# Altium PCB Main.PcbDoc
Units mm, origin at the board's own origin, x right, y up, seen from the top; angles counter-clockwise.
Board outline 149.63 x 99.44 mm, 2 copper layers (Top Layer, Bottom Layer); 13 components, 23 nets, 198 pads, 0 vias.
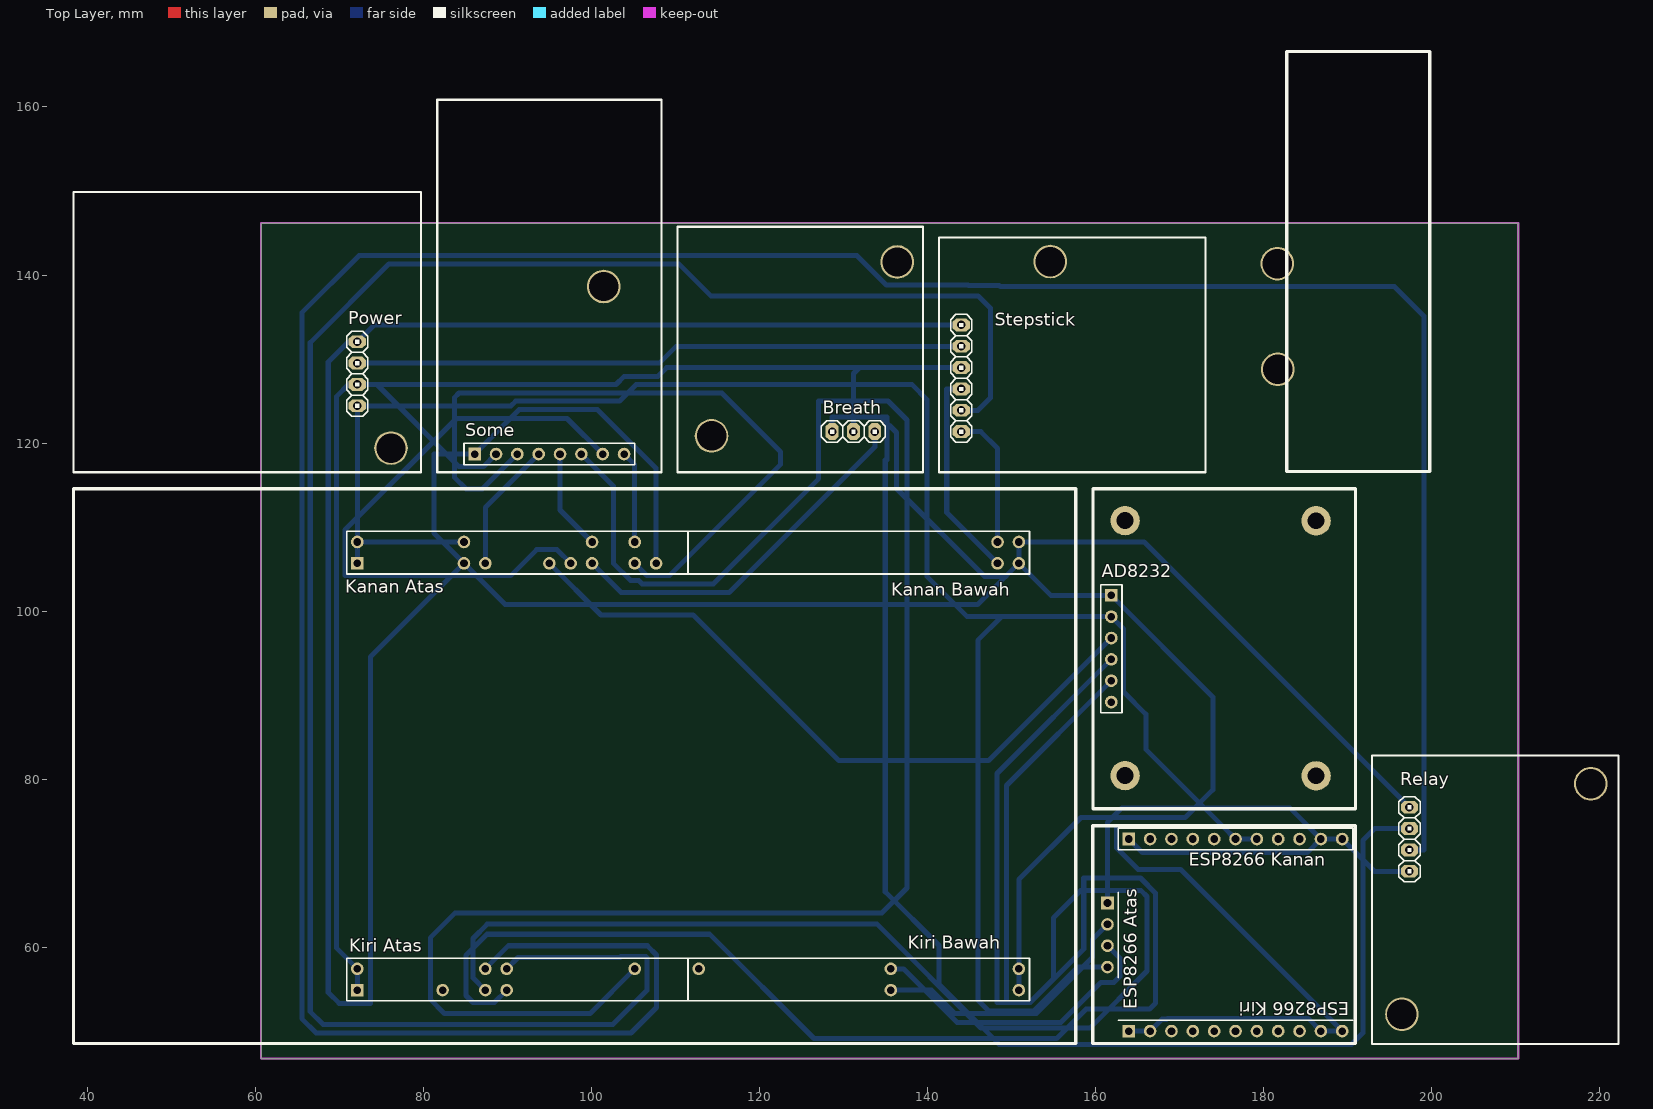
[diagram p0: Top Layer view]
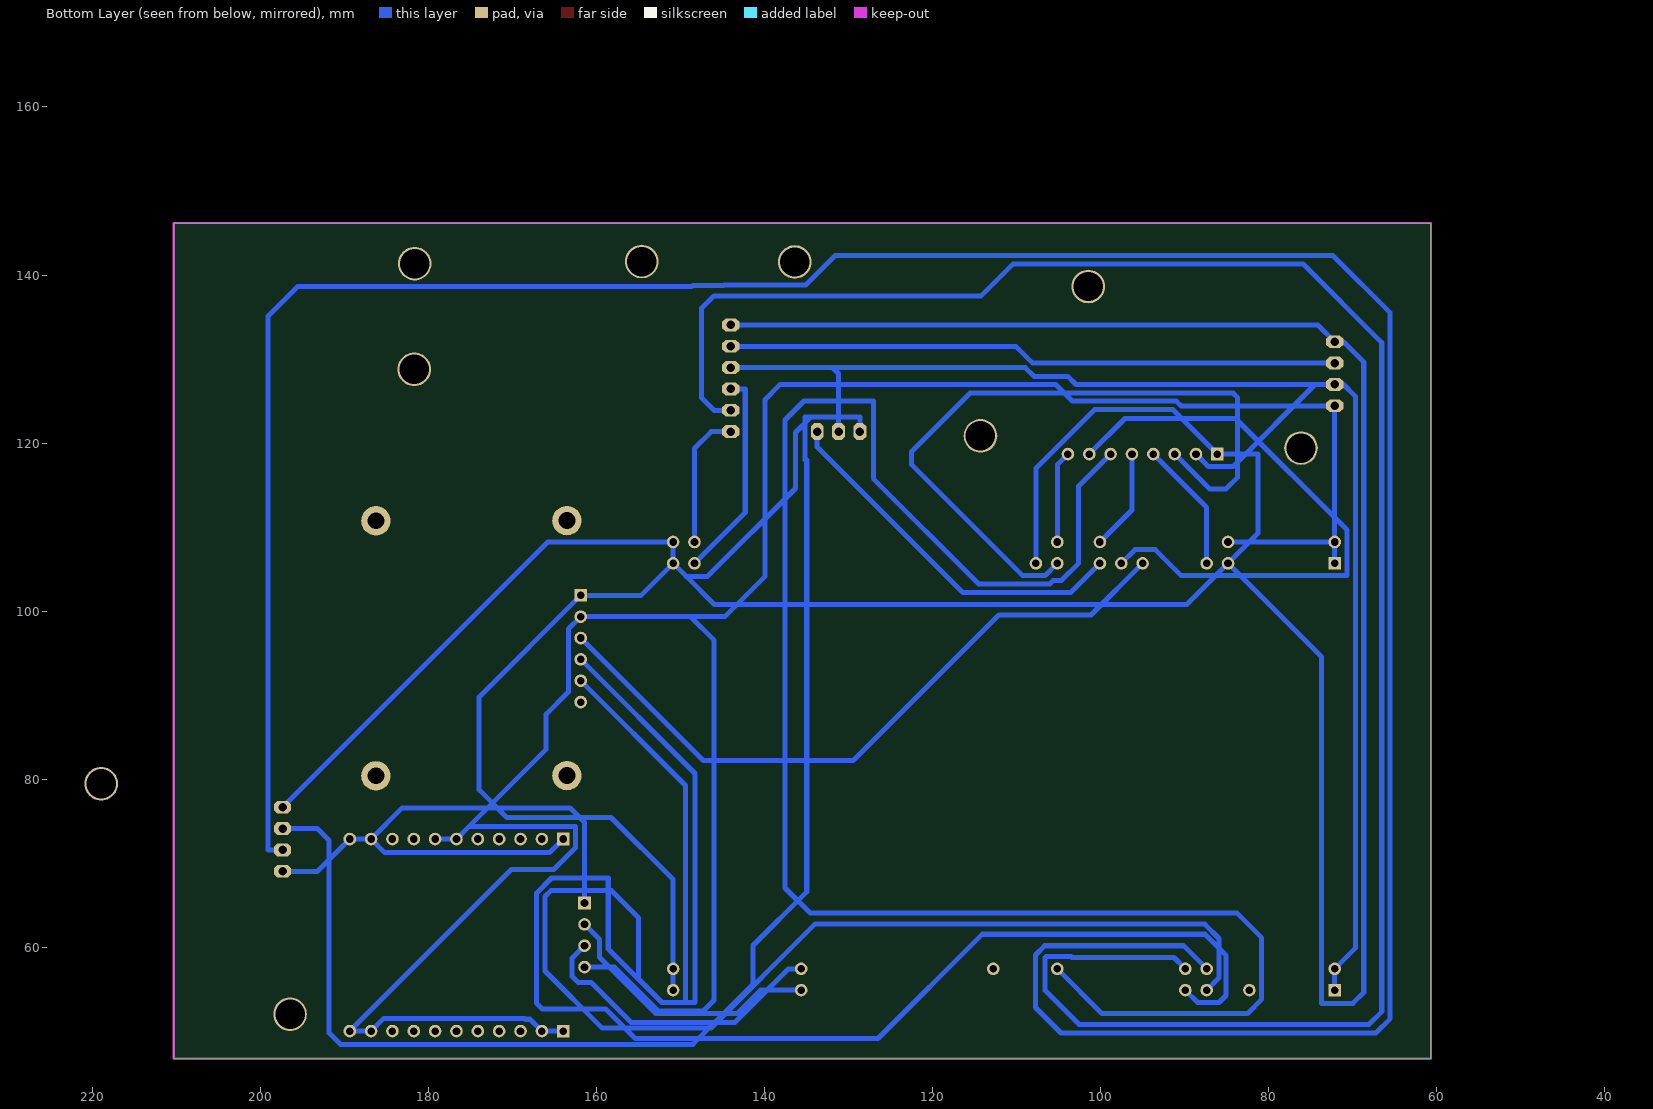
[diagram p1: Bottom Layer view, seen from below]

## Layer stack, top to bottom
Top Solder: solder mask 0.0102, Solder Resist, Dk 3.5
Top Layer: signal copper 0.0356
Dielectric 1: dielectric 0.32, FR-4, Dk 4.8
Bottom Layer: signal copper 0.0356
Bottom Solder: solder mask 0.0102, Solder Resist, Dk 3.5

## Board outline
60.706,46.736 210.337,46.736 210.337,146.177 60.706,146.177

## Design rules (kind name [scope] priority, off if disabled: settings)
Clearance [All] p1: gap=0.4
PolygonConnect [All] p1: connectstyle=Relief reliefconductorwidth=0.254 reliefentries=4 polygonreliefangle="90 Angle" airgapwidth=0.254
RoutingVias [All] p1: holewidth=0.711 width=1.27 viastyle="Through Hole" minholewidth=0.711 minwidth=1.27 maxholewidth=0.711 maxwidth=1.27
SolderMaskExpansion [All] p1: expansion=0.102
Width Width_1 [All] p1: maxlimit=0.6 minlimit=0.6 preferedwidth=0.6
30 further rules are at their usual default settings.

## Components (designator, comment, footprint, x,y, rotation, side; value= is the part's Value field where it differs from the comment)
AD8232 "" HDR1X6 161.9,101.879 r270 top
Breath "Breath" My_1X03 131.216,121.361 r0 top (schematic designator o)
"ESP8266 Atas" "" HDR1X4 161.447,65.258 r270 top
"ESP8266 Kanan" "" HDR1X11 163.987,72.878 r0 top
"ESP8266 Kiri" "" HDR1X11 163.987,50.018 r0 top
"Kanan Atas" "" HDR2X16#1 72.161,105.689 r0 top
"Kanan Bawah" "" HDR2X16#2 112.801,105.689 r0 top
"Kiri Atas" "" HDR2X16#3 72.161,54.889 r0 top
"Kiri Bawah" "" HDR2X16#4 112.801,54.889 r0 top
Power "Header 4" My_1X04 72.161,128.245 r270 top
Relay "Header 4" My_1X04 197.383,72.847 r270 top
Some "Header 8" HDR1X8 86.131,118.694 r0 top
Stepstick "Header 6" My_1X06 144.043,127.711 r270 top

## Footprints (in the part's own frame and the unit in brackets; to place one, negate y for a bottom-side part, rotate by r counter-clockwise, add the part's x,y. Pads: shape width x height; smd on the part's side, far side on the other; paste and mask are expansions set on the pad)
HDR1X4 [mm] "Connector; Header; 4 Position"
  rect 1.5x1.5 hole 0.9: 1(0,0)
  round 1.5 hole 0.9: 2(2.54,0) 3(5.08,0) 4(7.62,0)
  silkscreen extent -1.27,1.27 8.89,1.27
HDR1X6 [mm] "Connector; Header; 6 Position"
  rect 1.5x1.5 hole 0.9: 1(0,0)
  round 1.5 hole 0.9: 2(2.54,0) 3(5.08,0) 4(7.62,0) 5(10.16,0) 6(12.7,0)
  silkscreen extent -1.27,-1.27 13.97,1.27
HDR1X8 [mm] "Connector; Header; 8 Position"
  rect 1.5x1.5 hole 0.9: 1(0,0)
  round 1.5 hole 0.9: 2(2.54,0) 3(5.08,0) 4(7.62,0) 5(10.16,0) 6(12.7,0) 7(15.24,0) 8(17.78,0)
  silkscreen extent -1.27,-1.27 19.05,1.27
HDR1X11 [mm] "Connector; Header; 11 Position"
  rect 1.5x1.5 hole 0.9: 1(0,0)
  round 1.5 hole 0.9: 2(2.54,0) 3(5.08,0) 4(7.62,0) 5(10.16,0) 6(12.7,0) 7(15.24,0) 8(17.78,0) 9(20.32,0) 10(22.86,0) 11(25.4,0)
  silkscreen extent -1.27,-1.27 26.67,1.27
HDR2X16#1 [mm] "Connector; Header; 16x2 Position"
  rect 1.5x1.5 hole 0.9: 1(0,0)
  round 1.5 hole 0.9: 2(0,2.54) 11(12.7,0) 12(12.7,2.54) 13(15.24,0) 19(22.86,0) 21(25.4,0) 23(27.94,0) 24(27.94,2.54) 27(33.02,0) 28(33.02,2.54) 29(35.56,0)
  round 0 all layers, no hole: 3(2.54,0) 4(2.54,2.54) 5(5.08,0) 6(5.08,2.54) 7(7.62,0) 8(7.62,2.54) 9(10.16,0) 10(10.16,2.54) 14(15.24,2.54) 15(17.78,0) 16(17.78,2.54) 17(20.32,0) 18(20.32,2.54) 20(22.86,2.54) 22(25.4,2.54) 25(30.48,0) 26(30.48,2.54) 30(35.56,2.54) 31(38.1,0) 32(38.1,2.54)
  silkscreen extent -1.27,-1.27 39.37,3.81
HDR2X16#2 [mm] "Connector; Header; 16x2 Position"
  rect 0x0 all layers, no hole: 1(0,0)
  round 0 all layers, no hole: 2(0,2.54) 3(2.54,0) 4(2.54,2.54) 5(5.08,0) 6(5.08,2.54) 7(7.62,0) 8(7.62,2.54) 9(10.16,0) 10(10.16,2.54) 11(12.7,0) 12(12.7,2.54) 13(15.24,0) 14(15.24,2.54) 15(17.78,0) 16(17.78,2.54) 17(20.32,0) 18(20.32,2.54) 19(22.86,0) 20(22.86,2.54) 21(25.4,0) 22(25.4,2.54) 23(27.94,0) 24(27.94,2.54) 25(30.48,0) 26(30.48,2.54) 27(33.02,0) 28(33.02,2.54)
  round 1.5 hole 0.9: 29(35.56,0) 30(35.56,2.54) 31(38.1,0) 32(38.1,2.54)
  silkscreen extent -1.27,-1.27 39.37,3.81
HDR2X16#3 [mm] "Connector; Header; 16x2 Position"
  rect 1.5x1.5 hole 0.9: 1(0,0)
  round 1.5 hole 0.9: 2(0,2.54) 9(10.16,0) 13(15.24,0) 14(15.24,2.54) 15(17.78,0) 16(17.78,2.54) 28(33.02,2.54)
  round 0 all layers, no hole: 3(2.54,0) 4(2.54,2.54) 5(5.08,0) 6(5.08,2.54) 7(7.62,0) 8(7.62,2.54) 10(10.16,2.54) 11(12.7,0) 12(12.7,2.54) 17(20.32,0) 18(20.32,2.54) 19(22.86,0) 20(22.86,2.54) 21(25.4,0) 22(25.4,2.54) 23(27.94,0) 24(27.94,2.54) 25(30.48,0) 26(30.48,2.54) 27(33.02,0) 29(35.56,0) 30(35.56,2.54) 31(38.1,0) 32(38.1,2.54)
  silkscreen extent -1.27,-1.27 39.37,3.81
HDR2X16#4 [mm] "Connector; Header; 16x2 Position"
  rect 0x0 all layers, no hole: 1(0,0)
  round 1.5 hole 0.9: 2(0,2.54) 19(22.86,0) 20(22.86,2.54) 31(38.1,0) 32(38.1,2.54)
  round 0 all layers, no hole: 3(2.54,0) 4(2.54,2.54) 5(5.08,0) 6(5.08,2.54) 7(7.62,0) 8(7.62,2.54) 9(10.16,0) 10(10.16,2.54) 11(12.7,0) 12(12.7,2.54) 13(15.24,0) 14(15.24,2.54) 15(17.78,0) 16(17.78,2.54) 17(20.32,0) 18(20.32,2.54) 21(25.4,0) 22(25.4,2.54) 23(27.94,0) 24(27.94,2.54) 25(30.48,0) 26(30.48,2.54) 27(33.02,0) 28(33.02,2.54) 29(35.56,0) 30(35.56,2.54)
  silkscreen extent -1.27,-1.27 39.37,3.81
My_1X03 [mil]
  oct 60x80 hole 40: 1(-100,0) 2(0,0) 3(100,0)
  silkscreen extent -150,-50 150,50
My_1X04 [mil]
  oct 60x80 hole 40: 1(-150,0) 2(-50,0) 3(50,0) 4(150,0)
  silkscreen extent -200,-50 200,50
My_1X06 [mil]
  oct 60x80 hole 40: 1(-250,0) 2(-150,0) 3(-50,0) 4(50,0) 5(150,0) 6(250,0)
  silkscreen extent -300,-50 300,50

## Part data
AD8232: library part "Header 6", "Header, 6-Pin"
Breath: library part "Header 3", "Header, 3-Pin"
"ESP8266 Atas": library part "Header 4", "Header, 4-Pin"
"ESP8266 Kanan" "ESP8266 Kiri": library part "Header 11", "Header, 11-Pin"
"Kanan Atas" "Kanan Bawah" "Kiri Atas" "Kiri Bawah": library part "Header 16X2", "Header, 16-Pin, Dual row"
Power Relay: "Header, 4-Pin"
Some: "Header, 8-Pin"
Stepstick: "Header, 6-Pin"

## Free pads (board coordinates)
  round 4 hole 3.5: 2(154.635,141.605) 2(181.661,141.355) 2(181.712,128.778) 3(101.498,138.633) 8(76.175,119.405) 9(114.325,120.853) 9(136.423,141.554) 10(196.494,52.019) 10(218.973,79.451)
  round 3.5 hole 2: 6(186.274,80.395) 7(163.541,80.42) 8(163.541,110.773) 9(186.274,110.748)

## Nets (pads, with @x,y where several pads share a name; then routed paths per layer and width w, separated by ;. In a path a pad name is that pad's centre, name@x,y a point inside that pad or via, vN(x,y) a via of type N, cw(c..) or ccw(c..) an arc to the next point about the centre after c; other vN are vias at no path point)
+3.3: "ESP8266 Atas.4" "ESP8266 Kanan.6" "ESP8266 Kanan.7" "ESP8266 Kiri.1" "ESP8266 Kiri.2" "ESP8266 Kiri.10" "ESP8266 Kiri.11" "Kanan Atas.1" "Kanan Atas.2" "Kanan Atas.12" AD8232.2 Power.4 | length 323.8
  Bottom Layer w0.6: 72.161,105.689 72.161,108.229 ; 84.861,108.229 72.161,108.229 ; 161.447,57.638 157.897,57.638 152.659,52.4 147.32,52.4 146.016,53.704 146.016,96.52 148.836,99.339 ; 163.987,50.018 166.527,50.018 167.933,51.423 168.496,51.423 168.609,51.537 185.328,51.537 186.847,50.018 189.387,50.018 170.164,69.24 165.1,69.24 162.535,71.806 162.535,74.346 175.219,74.346 ; 179.227,72.878 176.687,72.878 175.219,74.346 ; 72.161,108.229 Power.4 90.449,124.435 91.008,124.993 103.378,124.993 105.334,126.949 138.201,126.949 139.954,125.197 139.954,104.14 144.755,99.339 148.836,99.339 ; 148.836,99.339 AD8232.2 163.373,97.866 163.373,90.373 166.014,87.732 166.014,83.55 175.219,74.346
+5: "Kiri Atas.1" "Kiri Atas.2" Breath.2 Power.3 Relay.2 Some.2 Stepstick.3 | length 331.6
  Bottom Layer w0.6: 72.161,54.889 72.201,54.929 72.201,57.39 72.161,57.429 69.711,59.879 69.711,125.566 71.12,126.975 Power.3 74.498,126.975 ; Some.2 87.198,117.221 84.252,117.221 74.498,126.975 ; Breath.2 131.216,123.088 ; Stepstick.3 131.928,128.981 ; Relay.2 193.269,74.117 191.872,72.72 191.872,49.809 190.5,48.438 148.565,48.438 141.402,55.601 141.402,60.198 135.001,66.599 135.001,118.008 135.23,118.008 135.23,123.088 131.216,123.088 ; 74.498,126.975 102.962,126.975 103.937,127.949 107.959,127.949 108.991,128.981 131.928,128.981 ; 131.216,123.088 131.216,128.27 131.928,128.981
+7.4: Power.2 Stepstick.2 | length 72.7
  Bottom Layer w0.6: Power.2 108.102,129.515 110.109,131.521 Stepstick.2
GND: "Kanan Atas.11" "Kanan Atas.29" "Kanan Bawah.31" "Kanan Bawah.32" "Kiri Bawah.31" "Kiri Bawah.32" AD8232.1 Breath.1 Power.1 Relay.1 Some.1 Stepstick.1 | length 519.8
  Bottom Layer w0.6: 107.721,105.689 107.721,117.018 100.762,123.977 91.415,123.977 Some.1 81.28,118.694 81.28,109.271 84.861,105.689 ; Breath.1 128.676,123.088 134.518,123.088 136.347,121.26 136.347,114.605 146.812,104.14 149.352,104.14 ; Stepstick.1 74.168,134.061 Power.1 71.12,132.055 68.707,129.642 68.707,54.61 70.002,53.315 73.736,53.315 73.736,94.564 84.861,105.689 ; 150.901,54.889 150.901,57.429 150.901,68.047 158.293,75.438 170.688,75.438 173.99,78.74 173.99,89.789 AD8232.1 154.711,101.879 150.901,105.689 ; Relay.1 165.811,108.229 150.901,108.229 150.901,105.689 ; 84.861,105.689 89.764,100.787 145.999,100.787 149.352,104.14 ; 149.352,104.14 150.901,105.689
NetAD8232_3: "Kanan Atas.19" AD8232.3 | length 82.7
  Bottom Layer w0.6: 95.021,105.689 101.168,99.543 112.141,99.543 129.489,82.194 147.295,82.194 AD8232.3
NetAD8232_4: "Kiri Atas.15" AD8232.4 | length 190.8
  Bottom Layer w0.6: 89.941,54.889 88.468,53.416 85.928,53.416 85.09,54.254 85.09,59.03 87.605,61.544 114.097,61.544 126.514,49.127 155.401,49.127 158.902,52.629 166.446,52.629 167.157,53.34 167.157,66.437 165.37,68.224 158.623,68.224 158.623,59.778 152.261,53.416 148.311,53.416 148.311,80.67 AD8232.4
NetAD8232_5: "Kiri Atas.13" AD8232.5 | length 174.7
  Bottom Layer w0.6: 87.401,54.889 85.928,56.363 85.928,61.036 87.63,62.738 134.036,62.738 146.406,50.368 159.334,50.368 166.141,57.175 166.141,66.04 165.456,66.726 158.242,66.726 155.016,63.5 155.016,56.236 152.197,53.416 149.428,53.416 149.428,79.248 AD8232.5
NetBuzzer_1: "Kiri Atas.9"
"NetESP8266 Atas_1": "ESP8266 Atas.1" "ESP8266 Kanan.1" "ESP8266 Kanan.10" "ESP8266 Kanan.11" Relay.4 | length 73.6
  Bottom Layer w0.6: 161.447,65.258 161.447,74.858 163.17,76.581 183.144,76.581 186.847,72.878 ; 163.987,72.878 165.618,71.247 185.216,71.247 186.847,72.878 ; Relay.4 193.227,69.037 189.387,72.878 186.847,72.878
"NetESP8266 Atas_2": "ESP8266 Atas.2" "Kiri Bawah.19" | length 32.6
  Bottom Layer w0.6: 135.661,54.889 140.513,54.889 143.281,52.121 152.984,52.121 159.639,58.776 159.639,60.91 161.447,62.718
"NetESP8266 Atas_3": "ESP8266 Atas.3" "Kiri Bawah.20" | length 36.4
  Bottom Layer w0.6: 135.661,57.429 137.16,57.429 143.561,51.029 155.888,51.029 160.663,55.804 162.204,55.804 162.916,56.515 162.916,58.709 161.447,60.178
"NetKanan Atas_13": "Kanan Atas.13" Some.4 | length 15.6
  Bottom Layer w0.6: 87.401,105.689 87.401,112.344 Some.4
"NetKanan Atas_20": "Kanan Atas.20"
"NetKanan Atas_21": "Kanan Atas.21" Some.7 | length 72.2
  Bottom Layer w0.6: 97.561,105.689 95.936,107.315 93.523,107.315 90.424,104.216 71.704,104.216 71.681,104.239 70.711,104.239 70.711,109.677 83.97,122.936 97.13,122.936 Some.7
"NetKanan Atas_23": "Kanan Atas.23" Breath.3 | length 44.1
  Bottom Layer w0.6: 100.101,105.689 103.575,102.216 116.43,102.216 133.756,119.543 Breath.3
"NetKanan Atas_24": "Kanan Atas.24" Some.5 | length 12
  Bottom Layer w0.6: Some.5 96.291,112.039 100.101,108.229
"NetKanan Atas_27": "Kanan Atas.27" Some.3 | length 86.2
  Bottom Layer w0.6: Some.3 87.071,114.554 85.09,114.554 83.718,115.926 83.718,125.4 84.277,125.959 115.545,125.959 122.555,118.948 122.555,117.475 109.296,104.216 106.655,104.216 105.181,105.689
"NetKanan Atas_28": "Kanan Atas.28" Some.8 | length 11
  Bottom Layer w0.6: Some.8 105.181,117.424 105.181,108.229
"NetKanan Bawah_29": "Kanan Bawah.29" Stepstick.4 | length 25
  Bottom Layer w0.6: Stepstick.4 142.316,126.441 142.316,111.735 148.361,105.689
"NetKanan Bawah_30": "Kanan Bawah.30" Stepstick.6 | length 16.3
  Bottom Layer w0.6: Stepstick.6 146.38,121.361 148.361,119.38 148.361,108.229
"NetKiri Atas_14": "Kiri Atas.14" Relay.3 | length 361
  Bottom Layer w0.6: 87.401,57.429 90.145,60.173 106.68,60.173 107.784,59.069 107.784,52.826 104.748,49.791 67.269,49.791 65.565,51.495 65.565,135.517 72.381,142.333 131.612,142.333 135.125,138.82 144.851,138.82 144.89,138.781 148.562,138.781 148.71,138.633 195.58,138.633 199.111,135.103 199.111,71.577 Relay.3
"NetKiri Atas_16": "Kiri Atas.16" Stepstick.5 | length 245.1
  Bottom Layer w0.6: 89.941,57.429 91.294,58.782 103.434,58.782 103.555,58.903 106.494,58.903 106.655,58.742 106.655,54.864 102.581,50.791 68.105,50.791 66.565,52.331 66.565,131.951 75.947,141.333 110.432,141.333 114.233,137.532 146.05,137.532 147.535,136.047 147.535,125.386 146.05,123.901 Stepstick.5
"NetKiri Atas_28": "Kiri Atas.28" Some.6 | length 215.4
  Bottom Layer w0.6: Some.6 102.641,114.884 102.641,105.689 104.699,103.632 105.664,103.632 106.08,103.216 114.529,103.216 127.076,115.764 127.076,125.019 135.331,125.019 137.592,122.758 137.592,67.056 134.62,64.084 83.82,64.084 80.848,61.112 80.848,53.797 82.55,52.095 99.847,52.095 105.181,57.429
pads on no net: "ESP8266 Kanan.2" "ESP8266 Kanan.3" "ESP8266 Kanan.4" "ESP8266 Kanan.5" "ESP8266 Kanan.8" "ESP8266 Kanan.9" "ESP8266 Kiri.3" "ESP8266 Kiri.4" "ESP8266 Kiri.5" "ESP8266 Kiri.6" "ESP8266 Kiri.7" "ESP8266 Kiri.8" "ESP8266 Kiri.9" "Kanan Atas.3" "Kanan Atas.4" "Kanan Atas.5" "Kanan Atas.6" "Kanan Atas.7" "Kanan Atas.8" "Kanan Atas.9" "Kanan Atas.10" "Kanan Atas.14" "Kanan Atas.15" "Kanan Atas.16" "Kanan Atas.17" "Kanan Atas.18" "Kanan Atas.22" "Kanan Atas.25" "Kanan Atas.26" "Kanan Atas.30" "Kanan Atas.31" "Kanan Atas.32" "Kanan Bawah.1" "Kanan Bawah.2" "Kanan Bawah.3" "Kanan Bawah.4" "Kanan Bawah.5" "Kanan Bawah.6" "Kanan Bawah.7" "Kanan Bawah.8" "Kanan Bawah.9" "Kanan Bawah.10" "Kanan Bawah.11" "Kanan Bawah.12" "Kanan Bawah.13" "Kanan Bawah.14" "Kanan Bawah.15" "Kanan Bawah.16" "Kanan Bawah.17" "Kanan Bawah.18" "Kanan Bawah.19" "Kanan Bawah.20" "Kanan Bawah.21" "Kanan Bawah.22" "Kanan Bawah.23" "Kanan Bawah.24" "Kanan Bawah.25" "Kanan Bawah.26" "Kanan Bawah.27" "Kanan Bawah.28" "Kiri Atas.3" "Kiri Atas.4" "Kiri Atas.5" "Kiri Atas.6" "Kiri Atas.7" "Kiri Atas.8" "Kiri Atas.10" "Kiri Atas.11" "Kiri Atas.12" "Kiri Atas.17" "Kiri Atas.18" "Kiri Atas.19" "Kiri Atas.20" "Kiri Atas.21" "Kiri Atas.22" "Kiri Atas.23" "Kiri Atas.24" "Kiri Atas.25" "Kiri Atas.26" "Kiri Atas.27" "Kiri Atas.29" "Kiri Atas.30" "Kiri Atas.31" "Kiri Atas.32" "Kiri Bawah.1" "Kiri Bawah.2" "Kiri Bawah.3" "Kiri Bawah.4" "Kiri Bawah.5" "Kiri Bawah.6" "Kiri Bawah.7" "Kiri Bawah.8" "Kiri Bawah.9" "Kiri Bawah.10" "Kiri Bawah.11" "Kiri Bawah.12" "Kiri Bawah.13" "Kiri Bawah.14" "Kiri Bawah.15" "Kiri Bawah.16" "Kiri Bawah.17" "Kiri Bawah.18" "Kiri Bawah.21" "Kiri Bawah.22" "Kiri Bawah.23" "Kiri Bawah.24" "Kiri Bawah.25" "Kiri Bawah.26" "Kiri Bawah.27" "Kiri Bawah.28" "Kiri Bawah.29" "Kiri Bawah.30" AD8232.6

## Keep-outs
Keep-Out Layer:
  the board outline again, w0.254

## Silkscreen, mask and mechanical layers (free items; w line width, h text height)
Top Overlay:
  lines w0.254: 38.379,116.535 38.379,149.866 79.756,149.866 79.756,116.535 38.379,116.535 ; 81.686,116.535 108.356,116.535 108.356,160.858 81.686,160.858 81.686,116.535 ; 110.261,116.535 139.471,116.535 139.471,145.745 110.261,145.745 110.261,116.535 ; 141.376,116.535 173.126,116.535 173.126,144.475 141.376,144.475 141.376,116.535 ; 192.938,48.463 192.938,82.829 222.275,82.829 222.275,48.463 192.938,48.463
  lines w0.4: 38.383,48.539 38.383,114.579 157.683,114.579 157.683,48.539 38.383,48.539 ; 159.715,48.539 190.957,48.539 190.957,74.473 159.715,74.473 159.715,48.539 ; 159.724,76.461 190.966,76.461 190.966,114.561 159.724,114.561 159.724,76.461 ; 182.787,116.612 199.787,116.612 199.787,166.612 182.787,166.612 182.787,116.612